# Altium PCB GoodUSB_PCB.PcbDoc
Units mil, origin at the board's own origin, x right, y up, seen from the top; angles counter-clockwise.
Board outline 640 x 1210 mil, 2 copper layers (Top Layer, Bottom Layer); 20 components, 20 nets, 92 pads, 29 vias.
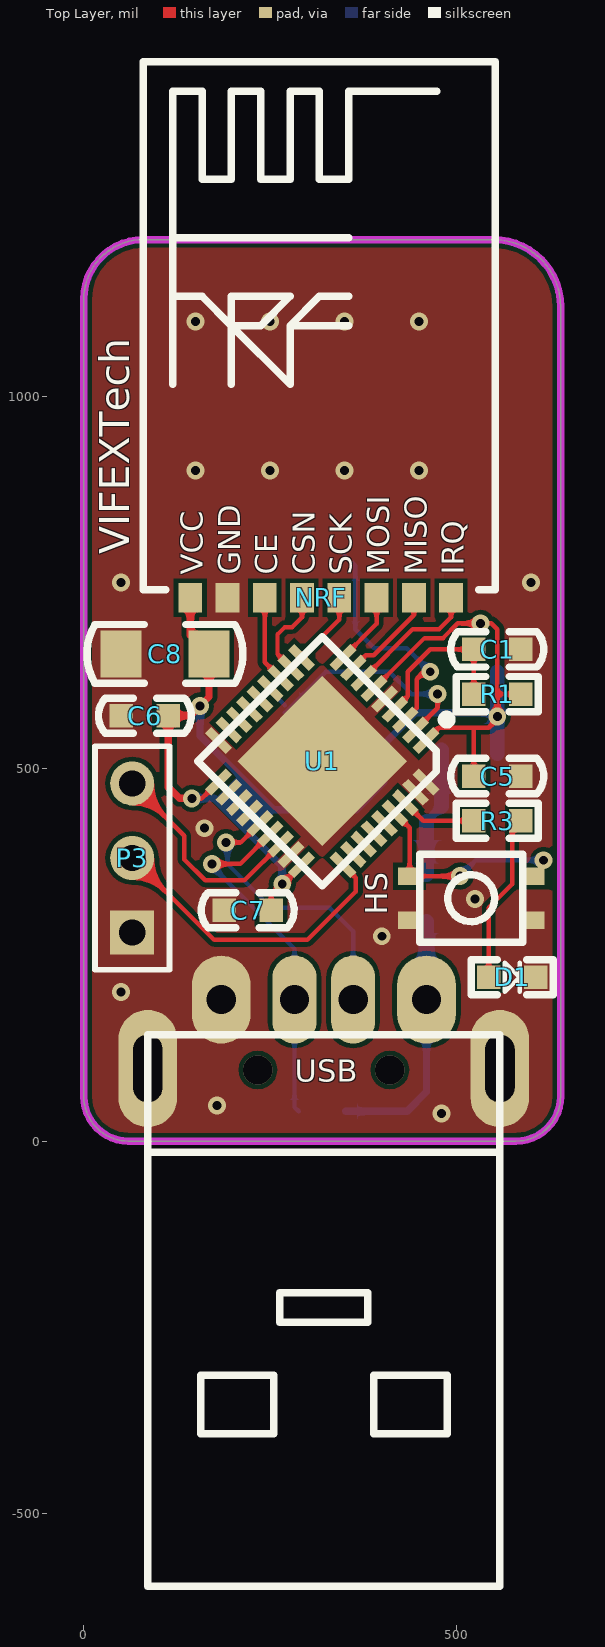
[diagram p0: Top Layer view]
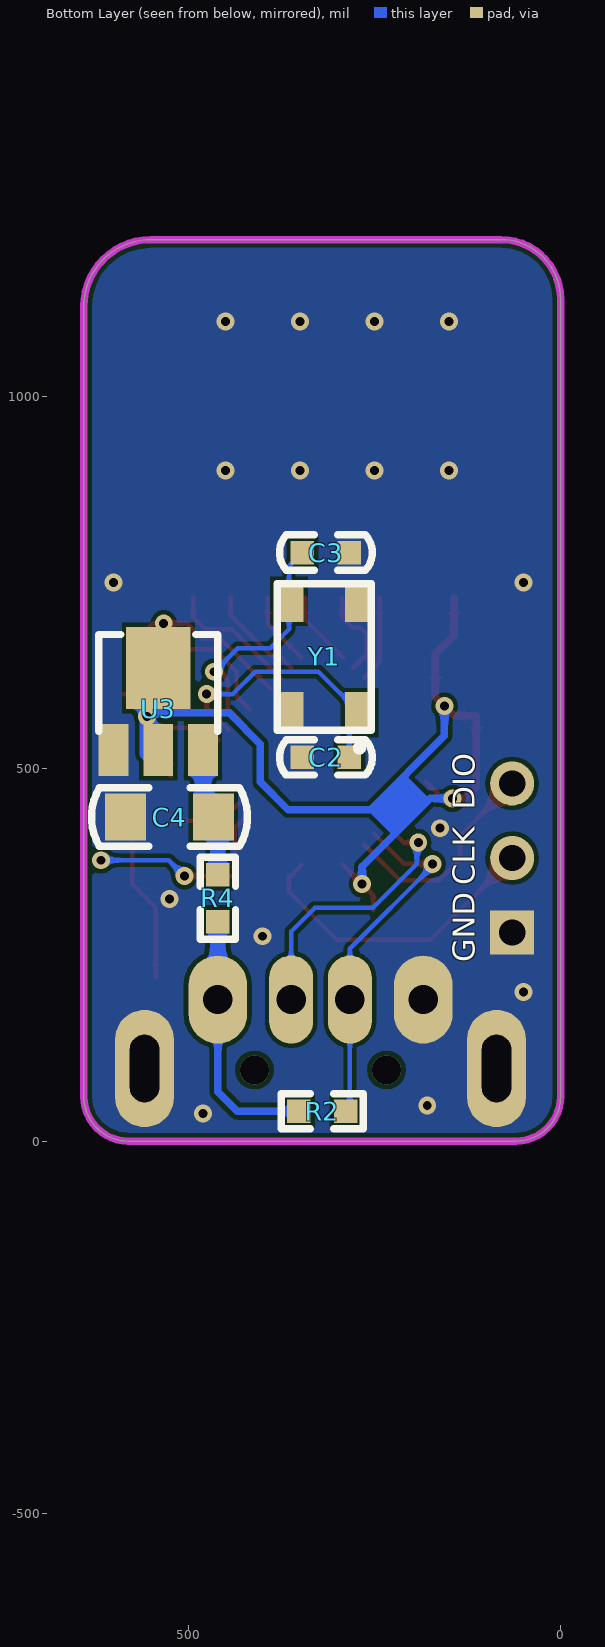
[diagram p1: Bottom Layer view, seen from below]
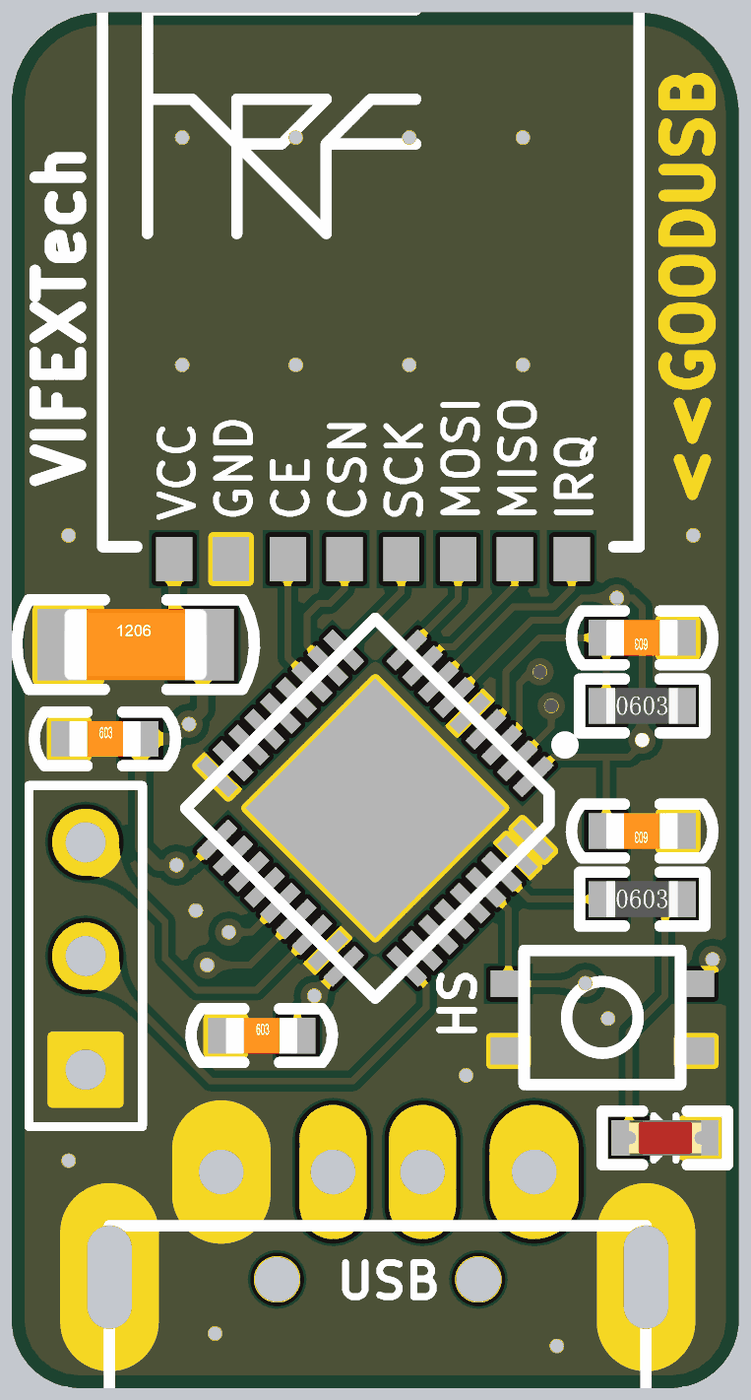
[diagram p2: 3D render of the assembled board from above, using the file's embedded part models]
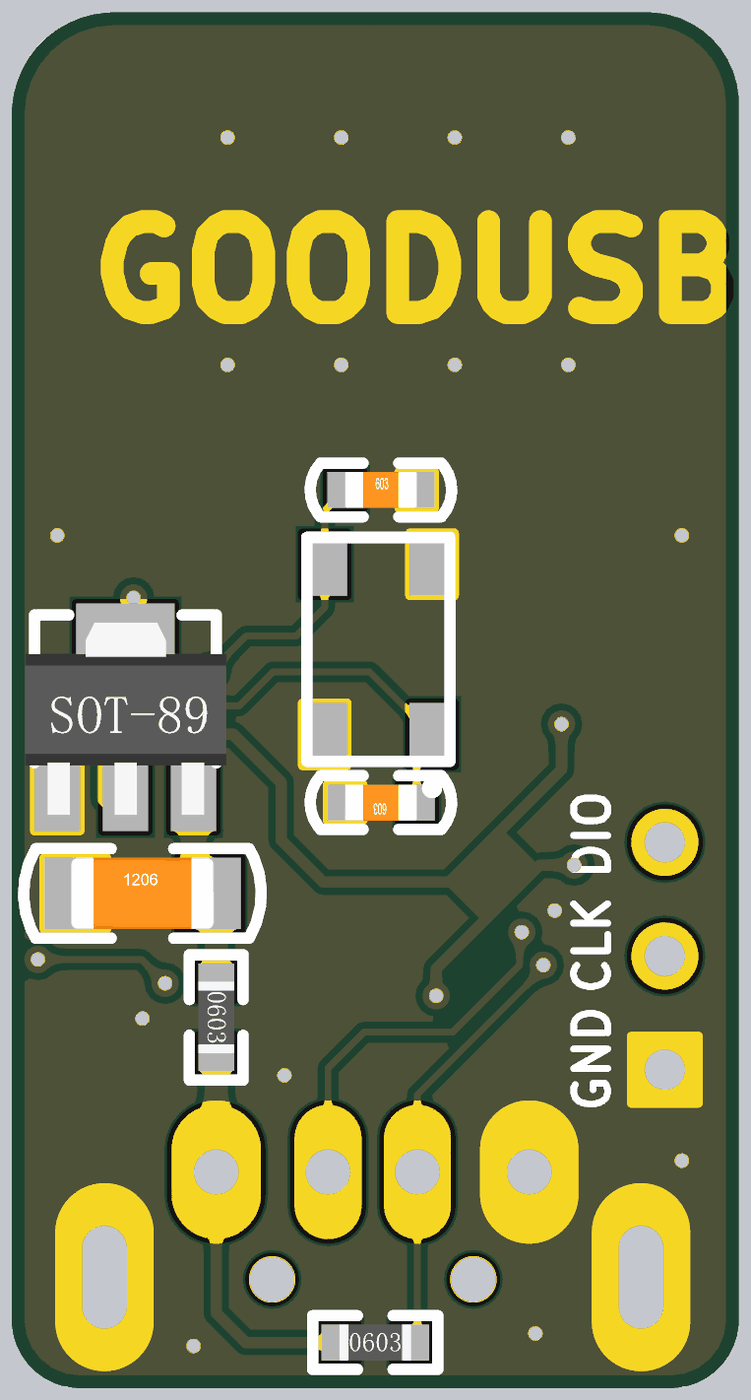
[diagram p3: 3D render of the assembled board from below, using the file's embedded part models]

## Layer stack, top to bottom
Top Solder: solder mask 0.4, Solder Resist, Dk 3.5
Top Layer: signal copper 1.4
Dielectric 1: dielectric 12.6, FR-4, Dk 4.8
Bottom Layer: signal copper 1.4
Bottom Solder: solder mask 0.4, Solder Resist, Dk 3.5

## Board outline
60,0 cw(c60,60) 0,60 0,1130 cw(c80,1130) 80,1210 550,1210 cw(c550,1120) 640,1120 640,60 cw(c580,60) 580,0

## Design rules (kind name [scope] priority, off if disabled: settings)
Clearance [All] p1: gap=6
HoleSize [All] p1 off: absolutevalues=TRUE maxlimit=100 minlimit=1 maxpercent=80.000 minpercent=20.000
HoleToHoleClearance [All] p1 off: gap=10 allowstackedmicrovias=TRUE
LayerPairs [All] p1 off: enforce=TRUE
MinimumSolderMaskSliver [All] p1 off: minsoldermaskwidth=10
NetAntennae [All] p1 off: netantennaetolerance=0
PlaneConnect [All] p1: planeconnectstyle=Direct reliefexpansion=20 reliefentries=4 reliefconductorwidth=10 reliefairgap=10
PolygonConnect [All] p1: connectstyle=Direct reliefconductorwidth=10 reliefentries=4 polygonreliefangle="90 Angle" airgapwidth=10
RoutingVias [All] p1: holewidth=12 width=24 viastyle="Through Hole" minholewidth=12 minwidth=24 maxholewidth=12 maxwidth=24
SilkToSilkClearance [All] p1 off: silktosilkclearance=10
SilkToSolderMaskClearance [IsPad] p1 off: minsilkscreentomaskgap=10 clearancetoexposedcopper=TRUE
SolderMaskExpansion [All] p1: expansion=4
Width [All] p1: maxlimit=100 minlimit=6 preferedwidth=6
22 further rules are at their usual default settings.

## Components (designator, comment, footprint, x,y, rotation, side; value= is the part's Value field where it differs from the comment)
C1 "104" 电容_C0603 555,660 r180 top
C2 "22pF" 电容_C0603 315,515 r0 bottom
C3 "22pf" 电容_C0603 315,790 r180 bottom
C4 "22uF" 电容_C1206 525,435 r180 bottom
C5 "1uF" 电容_C0603 555,490 r180 top
C6 "1uF" 电容_C0603 82,571 r0 top
C7 "1uF" 电容_C0603 220,310 r0 top
C8 "22uF" 电容_C1206 109,654 r0 top
D1 "red" LED_0603 575,220 r0 top
HS "key" 开关按键_SKTH 520,326 r0 top (schematic designator K2)
NRF "NRF_1" NRF-1 80,740 r0 top
P3 "SWD" HDR1X3 65,280 r90 top
R1 "10K" 电阻_R0603 555,600 r0 top
R2 "1.5K" 电阻_R0603 320,40 r180 bottom
R3 "100" 电阻_R0603 555,430 r0 top
R4 "1R" 电阻_R0603 460,326 r270 bottom
U1 "STM32F103T8U6" ST主控_VFQFPN36 320,510 r135 top
U3 "AMS1117" 稳压芯片_SOT-89 600,525 r180 bottom
USB "USB MHDR" "接插件_USB 公头 90°" 460,190 r90 top (schematic designator P1)
Y1 "XTAL" 晶振_5032 270,575 r90 bottom

## Footprints (in the part's own frame and the unit in brackets; to place one, negate y for a bottom-side part, rotate by r counter-clockwise, add the part's x,y. Pads: shape width x height; smd on the part's side, far side on the other; paste and mask are expansions set on the pad)
HDR1X3 [mm] "Connector; Header; 3 Position"
  rect 1.5x1.5 hole 0.9: 1(0,0)
  round 1.5 hole 0.9: 2(2.54,0) 3(5.08,0)
  silkscreen extent -1.27,-1.27 6.35,1.27
LED_0603 [mm]
  rect 0.8x0.8 smd: A(-0.8,0) K(0.8,0)
  silkscreen extent -1.4,-0.6 1.4,0.6, body extent -0.8,-0.4 0.82,0.4, height 0.6
NRF-1 [mm]
  rect 0.813x1 smd: 1(1.6,-0.275) 2(2.87,-0.275) 3(4.14,-0.275) 4(5.41,-0.275) 5(6.68,-0.275) 6(7.95,-0.275) 7(9.22,-0.275) 8(10.49,-0.275)
  silkscreen extent 0,0 12,18
ST主控_VFQFPN36 [mm] "6 x 6 mm"
  rect 4.1x4.1 smd: 0(0,0)
  rect 0.3x1 smd: 1(-2,-3) 2(-1.5,-3) 3(-1,-3) 4(-0.5,-3) 5(0,-3) 6(0.5,-3) 7(1,-3) 8(1.5,-3) 9(2,-3) 19(2,3) 20(1.5,3) 21(1,3) 22(0.5,3) 23(0,3) 24(-0.5,3) 25(-1,3) 26(-1.5,3) 27(-2,3)
  rect 1x0.3 smd: 10(3,-2) 11(3,-1.5) 12(3,-1) 13(3,-0.5) 14(3,0) 15(3,0.5) 16(3,1) 17(3,1.5) 18(3,2) 28(-3,2) 29(-3,1.5) 30(-3,1) 31(-3,0.5) 32(-3,0) 33(-3,-0.5) 34(-3,-1) 35(-3,-1.5) 36(-3,-2)
  silkscreen extent -3,-4.15 3,3
开关按键_SKTH [mm]
  rect 0.8x0.6 smd: 1(-2.1,-0.75) 1(2.1,-0.75) 2(-2.1,0.75) 2(2.1,0.75)
  silkscreen extent -1.75,-1.5 1.75,1.5
"接插件_USB 公头 90°" [mm]
  oval 4x2 hole 1 slot 2.3 at 0 deg paste+0.762: 0(-2.35,9.5) 0(-2.35,-2.5)
  oval 3x2 hole 1 paste+0.762: 1(0,0) 4(0,7)
  oval 3x1.5 hole 1 paste+0.762: 2(0,2.5) 3(0,4.5)
  silkscreen extent -20,-2.5 -1.2,9.5
晶振_5032 [mm]
  rect 1.4x1 smd: 0(0,2.4) 0(3.8,0) 1(0,0) 2(3.8,2.4)
  silkscreen extent -1.3,-0.4 4.4,2.8
电容_C0603 [mm]
  rect 0.8x0.8 smd: 1(-0.8,0) 2(0.8,0)
  silkscreen extent -1.58,-0.6 1.58,0.6, body extent -0.8,-0.4 0.8,0.4, height 0.3
电容_C1206 [mm]
  rect 1.4x1.6 smd: 1(-1.5,0) 2(1.5,0)
  silkscreen extent -2.66,-1 2.66,1, body extent -1.6,-0.8 1.6,0.8, height 1
电阻_R0603 [mm]
  rect 0.8x0.8 smd: 1(-0.8,0) 2(0.8,0)
  silkscreen extent -1.4,-0.6 1.4,0.6, body extent -0.8,-0.4 0.8,0.4, height 0.45
稳压芯片_SOT-89 [mil]
  rect 40x70 smd: 1(0,0) 2(60,0) 3(120,0)
  rect 86.61x110.24 smd: 2(60,110)
  silkscreen extent -20,25 140,155, body extent -28,-21 149,148, height 59

## Part data
C1 C2 C3 C4 C5 C6 C7 C8: library part cap
D1: library part LED
HS: library part SW-PB
P3: library part "Header 3", "Header, 3-Pin"
R1 R2 R3 R4: library part Res

## Via types
v1: diameter 24, hole 12, Top Layer to Bottom Layer, tented both sides, 27 vias
v2: diameter 39.37, hole 39.37, Top Layer to Bottom Layer, 2 vias

## Nets (pads, with @x,y where several pads share a name; then routed paths per layer and width w, separated by ;. In a path a pad name is that pad's centre, name@x,y a point inside that pad or via, vN(x,y) a via of type N, cw(c..) or ccw(c..) an arc to the next point about the centre after c; other vN are vias at no path point)
3V3: C5.2 C6.2 C7.2 C8.2 NRF.1 R1.2 U1.1 U1.6 U1.19 U1.27 U3.2 | length 1851.6
  Top Layer w6: v1(145,460) 158.64,460 U1.19 ; C7.2 251.5,330.14 v1(266.36,345) U1.27 ; U1.6 457.41,675.24 482.21,675.24 501.97,695 v1(532.73,695) 547,695 555,687 555,600 ; U1.1 476.36,555 525,555 ; C5.2 523.5,553.5 525,555 ; R1.2 555,600 ; 525,555 543.5,555 555,566.5 555,600
  Top Layer w10: NRF.1 142.99,679.06 C8.2 168.06,596.06 v1(156,584) 143,571 C6.2 113.5,475.01 128.5,460 v1(145,460)
  Bottom Layer w10: v1(145,460) 175,460 266.36,368.64 v1(266.36,345) ; v1(156,584) 156,544 255,445 365.86,445 402.93,482.07 402.93,532.93 445,575 v1@555,575
  Bottom Layer w20: U3.2@555,520 U3.2@555,630
  other v1: 555,570
5V: R2.1 R4.2 USB.1 | length 347.8
  Bottom Layer w10: R2.1 434,40 460,66 USB.1
  Bottom Layer w20: USB.1 R4.2
GND: C1.1 C2.2 C3.2 C4.1 C5.1 C6.1 C7.1 C8.1 D1.K HS.1 NRF.2 P3.1 U1.0 U1.5 U1.18 U1.26 U1.35 U1.36 U3.1 USB.0 USB.4 Y1.0
  other v1: 480,37 179,48 50,200 400,275 525,325 162,420 50,750 600,750 150,900 250,900 350,900 450,900 150,1100 250,1100 350,1100 450,1100
KEY: HS.2 U1.33 | length 281
  Top Layer w6: U1.33 437.32,420.52 437.32,355.53 v1@504.53,355.53
  Bottom Layer w6: v1(505,356) 526,377 v1(617,377)
LED: R3.1 U1.34 | length 102.2
  Top Layer w6: U1.34 455.68,430 R3.1
NetC4_2: C4.2 R4.1 U3.3 | length 175.8
  Bottom Layer w10: C4.2@460,429.06 C4.2 C4.2@480,449.06
  Bottom Layer w20: R4.1 C4.2@460,429.06 ; C4.2@480,449.06 U3.3
NetD1_A: D1.A R3.2 | length 213
  Top Layer w6: D1.A 543.5,313.5 575,345 R3.2@575,420
NRF_CE: NRF.3 U1.12 | length 116.7
  Top Layer w6: NRF.3 242.99,642.69 U1.12
NRF_CSN: NRF.4 U1.11 | length 121
  Top Layer w6: U1.11 260,653.52 260,680 270,690 280,690 292.99,702.99 NRF.4
NRF_IRQ: NRF.8 U1.7 | length 177.3
  Top Layer w6: U1.7 441.57,687.24 477.24,687.24 492.99,702.99 NRF.8
NRF_MISO: NRF.7 U1.8 | length 133.9
  Top Layer w6: U1.8 378.48,652 389.35,652 442.99,705.64 NRF.7
NRF_MOSI: NRF.6 U1.9 | length 98.7
  Top Layer w6: U1.9 392.99,694.35 NRF.6
NRF_SCK: NRF.5 U1.10 | length 101
  Top Layer w6: U1.10 342.99,700.03 NRF.5
OSC_IN: C2.1 U1.2 Y1.1 | length 385.5
  Top Layer w6: U1.2 475,581.48 v1(475,600)
  Bottom Layer w6: Y1.1@256.5,598.5 Y1.1@270,585 ; C2.1 283.5,561.5 Y1.1 325,630 410,630 440,600 v1(475,600)
OSC_OUT: C3.1 U1.3 Y1.2 | length 317.6
  Top Layer w6: U1.3 447,581.32 447,620 457,630 v1(465,630)
  Bottom Layer w6: C3.1 364.49,772.01 Y1.2 364.49,686.87 389.86,661.5 433.5,661.5 v1(465,630)
RST: C1.2 R1.1 U1.4 | length 218.6
  Top Layer w6: U1.4 435,597.16 435,630 465,660 C1.2 R1.1
SWCLK: P3.2 U1.28 | length 415.4
  Top Layer w6: P3.2 175,270 300,270 365,335 365,353.64 U1.28
SWDIO: P3.3 U1.25 | length 292.1
  Top Layer w6: P3.3 135,410 135,378 163,350 215.68,350 U1.25
USB_D+: R2.2 U1.24 USB.3 | length 511.7
  Top Layer w6: v1(172,372) 209.84,372 U1.24
  Top Layer w10: USB.3 USB.3@282.83,227.17
  Bottom Layer w6: v1@170.5,370.5 282.83,258.17 USB.3 282.83,45.67 R2.2
USB_D-: U1.23 USB.2 | length 383.4
  Top Layer w6: v1(191,401) 211,401 U1.23
  Bottom Layer w6: v1(191,401) 193,399 193,372 252,313 330,313 361.57,281.43 USB.2
pads on no net: U1.13 U1.14 U1.15 U1.16 U1.17 U1.20 U1.21 U1.22 U1.29 U1.30 U1.31 U1.32
copper on no net:
  other v2: 233.62,95.51 410.79,95.51

## Polygon pours and split planes (outlines as drawn)
GND on Top Layer "GND" (solid, remove dead copper, pour order 4): -190,1410 890,1410 920,1380 890,1350 890,-140 -190,-140 -280,-50
GND on Bottom Layer "GND" (solid, remove dead copper, pour order 6): -140,1400 -50,1490 830,1490 830,-30 750,-110 720,-80 -330,-80

## Keep-outs
Keep-Out Layer:
  lines w10: 80,1210 ccw(c80,1130) 0,1130 0,60 ccw(c60,60) 60,0 580,0 ccw(c580,60) 640,60 640,1120 ccw(c550,1120) 550,1210 80,1210 ; 80,1210 80,1210

## Other copper
Bottom Layer:
  region net 3V3: 224.64,409.64 260,445 210.5,494.5 175.15,459.14

## Silkscreen, mask and mechanical layers (free items; w line width, h text height)
Top Overlay:
  text "VIFEXTech" at 61,788 h40 r90
Bottom Overlay:
  text "DIO" at 115,445 h30 r270
  text "CLK" at 115.09,343.51 h30 r270
  text "GND" at 115,240 h30 r270
Top Solder:
  text "<<GOODUSB" at 615,770 h40 r90
Bottom Solder:
  text "GOODUSB" at 580,945 h80
Mechanical 1:
  the board outline again, w10

## Text inside footprints (layer, text, board x,y; h text height)
NRF: Top Overlay "IRQ" at 510,760 h30 r90; Top Overlay "MISO" at 460,760 h30 r90; Top Overlay "MOSI" at 410,760 h30 r90; Top Overlay "SCK" at 360,760 h30 r90; Top Overlay "CSN" at 310,760 h30 r90; Top Overlay "CE" at 260,760 h30 r90; Top Overlay "GND" at 210,760 h30 r90; Top Overlay "VCC" at 160,760 h30 r90